# Altium PCB FPGA_board.PcbDoc (part 4 of 7)
Units mm, origin at the board's own origin, x right, y up, seen from the top; angles counter-clockwise.
Board outline 120 x 95 mm, 2 copper layers (Top Layer, Bottom Layer); 242 components, 219 nets, 1224 pads, 430 vias.
Unrouted connection lines stored in the file: 9.
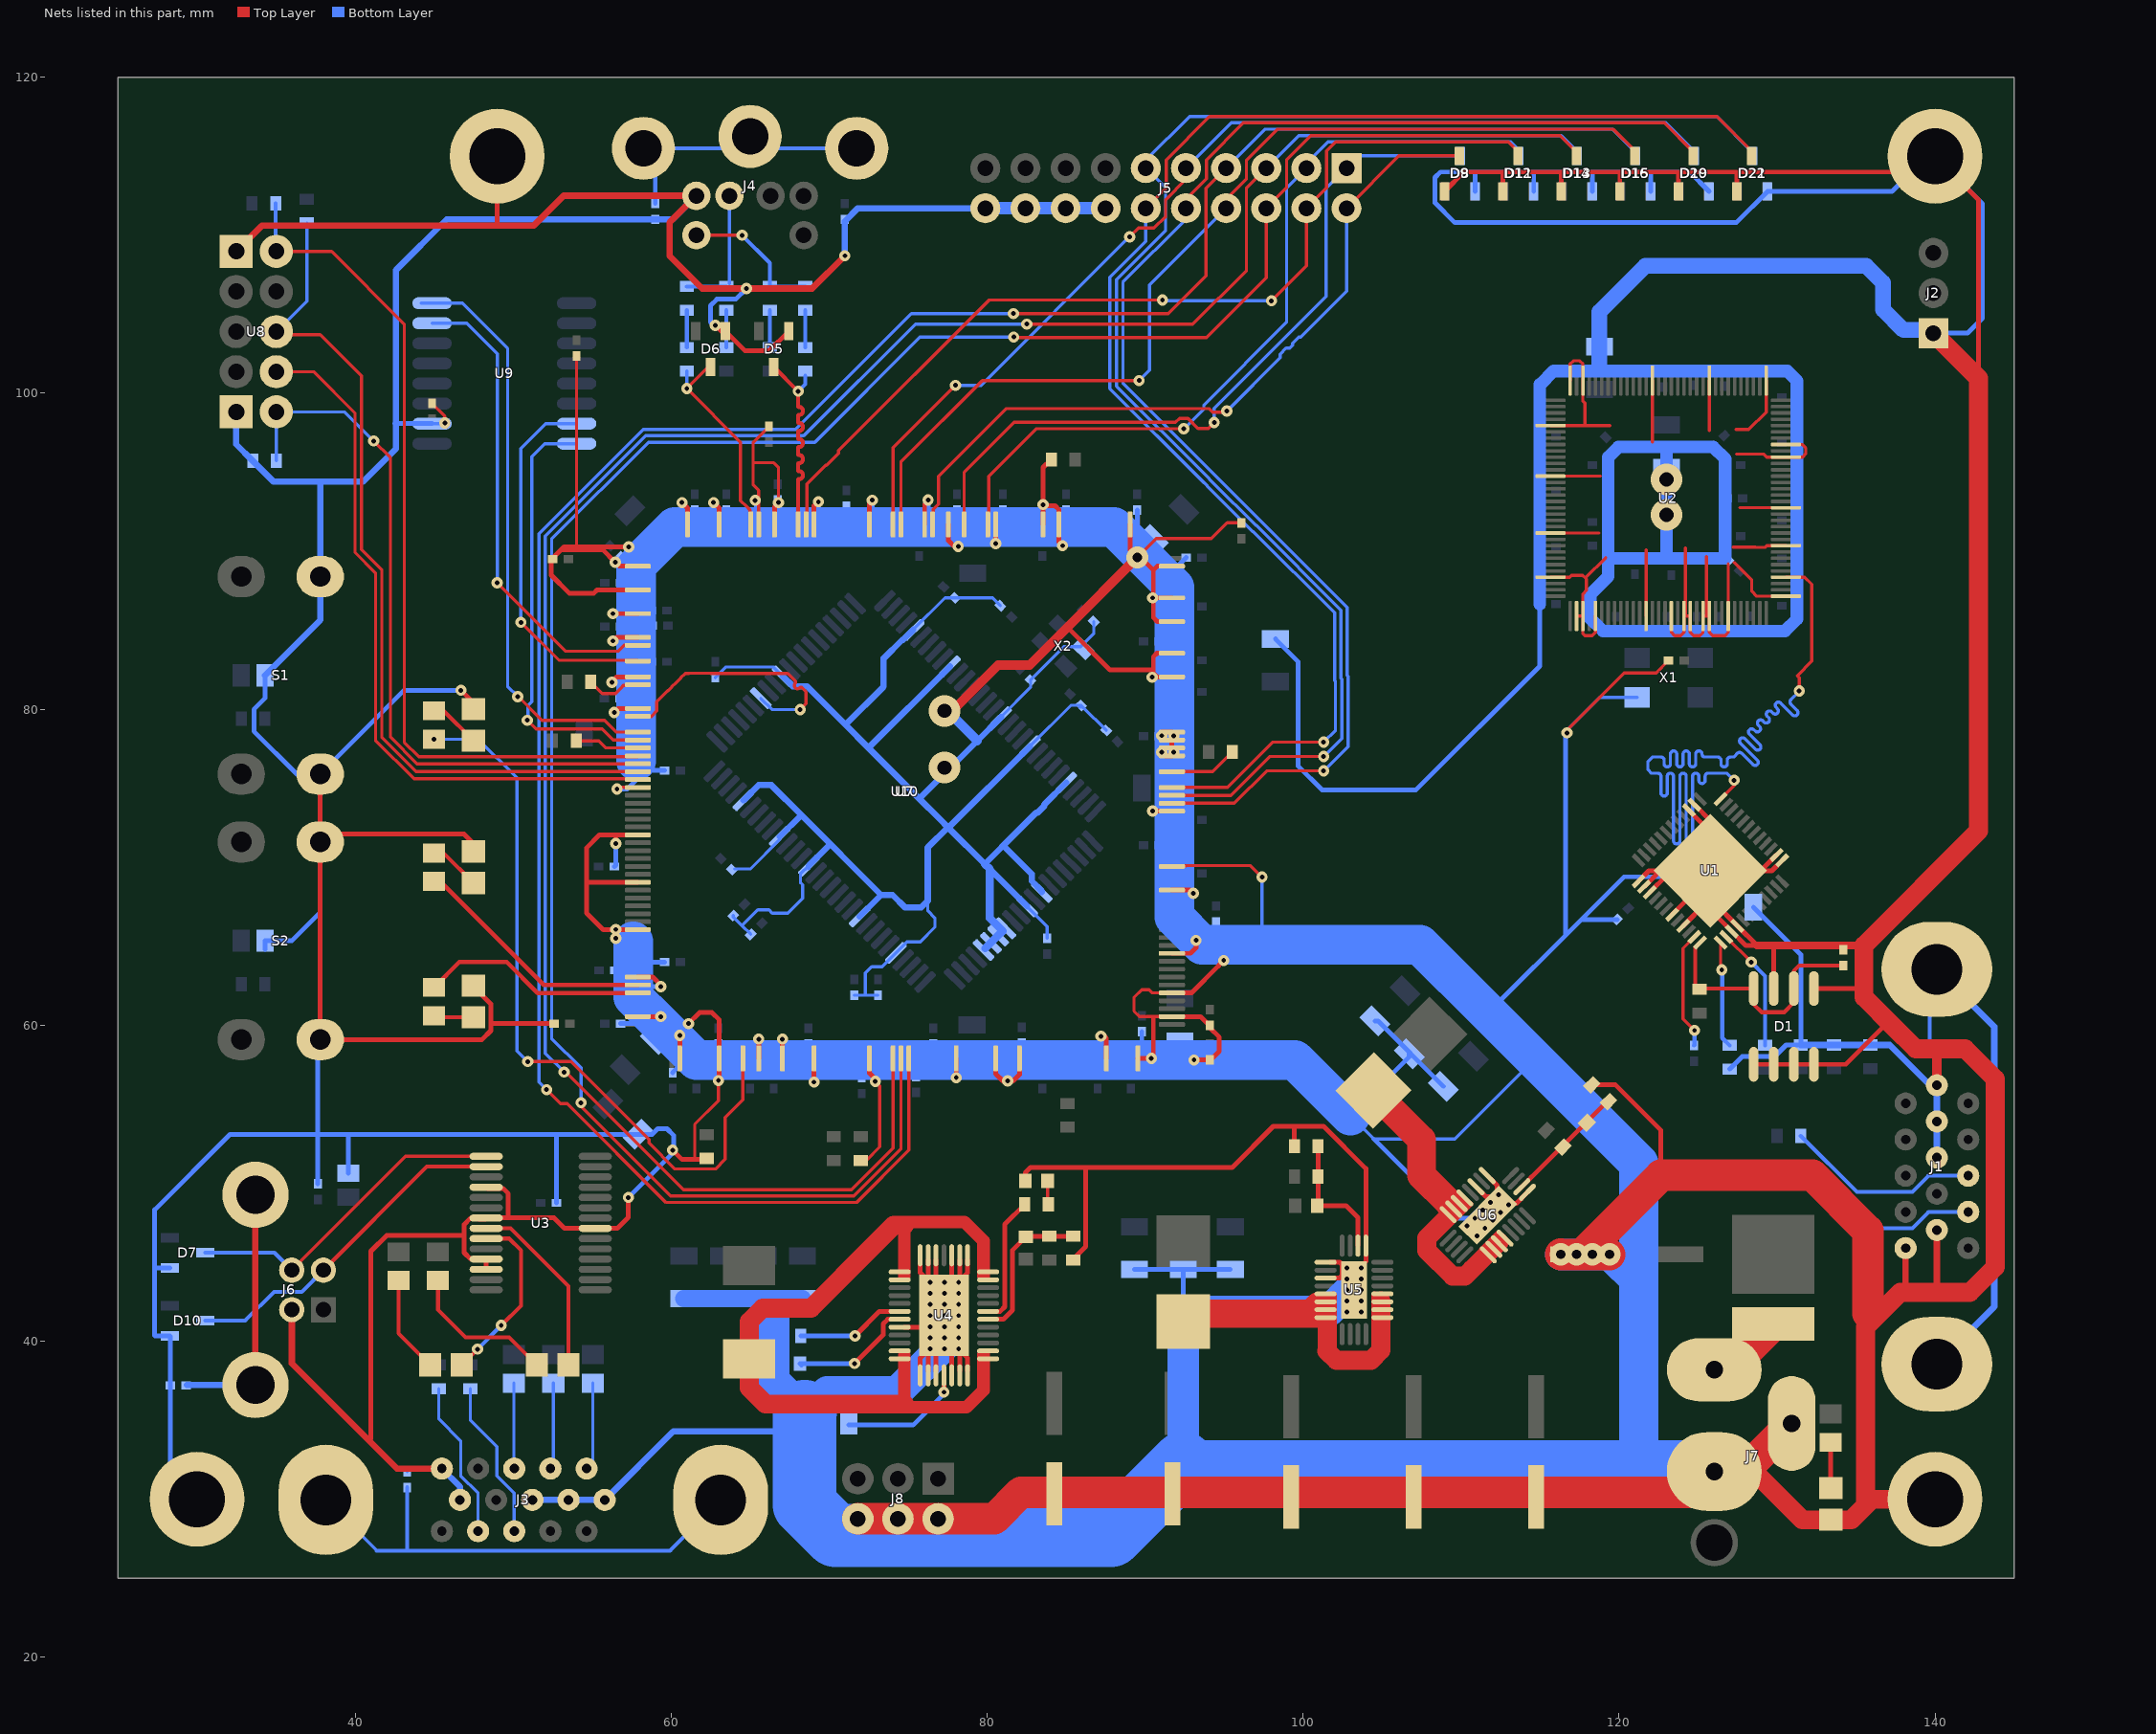
[diagram p4: the nets of this part, all layers, seen from the top]

## Via types
v1: diameter 0.71, hole 0.3, Top Layer to Bottom Layer, 393 vias
v2: diameter 1.4, hole 0.6, Top Layer to Bottom Layer, 32 vias
v3: diameter 2, hole 0.9, Top Layer to Bottom Layer, 4 vias
v4: diameter 1.2, hole 0.5, Top Layer to Bottom Layer, 1 vias

## Nets (pads, with @x,y where several pads share a name; then routed paths per layer and width w, separated by ;. In a path a pad name is that pad's centre, name@x,y a point inside that pad or via, vN(x,y) a via of type N, cw(c..) or ccw(c..) an arc to the next point about the centre after c; other vN are vias at no path point) (continued)
FB_SYNC: U1.12 U2.36 | length 64.4
  Top Layer w0.2: U1.12@126.429,74.318 127.281,75.17 v1(127.281,75.504) ; U2.36@130.56,88.353 131.749,88.353 132.19,87.913 132.19,83.04 131.275,82.125 131.404,81.996 v1(131.404,81.155)
  Bottom Layer w0.2: 125.85,76.975 125.65,76.975 ; v1(127.281,75.504) 126.835,75.95 125.625,75.95 ccw(c125.625,75.775) 125.45,75.775 125.45,75.5 cw(c125.25,75.5) 125.25,75.3 cw(c125.25,75.5) 125.05,75.5 125.05,75.75 ccw(c124.85,75.75) 124.85,75.95 ccw(c124.85,75.75) 124.65,75.75 124.65,71.673 cw(c124.45,71.673) 124.45,71.473 cw(c124.45,71.673) 124.25,71.673 124.25,75.75 ccw(c124.05,75.75) 124.05,75.95 ccw(c124.05,75.75) 123.85,75.75 123.85,71.673 cw(c123.65,71.673) 123.65,71.473 cw(c123.65,71.673) 123.45,71.673 123.45,75.75 ccw(c123.25,75.75) 123.25,75.95 ccw(c123.25,75.75) 123.05,75.75 123.05,74.702 cw(c122.85,74.702) 122.85,74.502 cw(c122.85,74.702) 122.65,74.702 122.65,75.75 ccw(c122.45,75.75) 122.45,75.95 122.25,75.95 122.05,75.95 121.825,76.175 121.825,76.7 122.1,76.975 122.45,76.975 122.65,76.975 cw(c122.65,76.775) 122.85,76.775 122.85,76.55 ccw(c123.05,76.55) 123.05,76.35 ccw(c123.05,76.55) 123.25,76.55 123.25,76.975 123.25,77.164 cw(c123.45,77.164) 123.45,77.364 cw(c123.45,77.164) 123.65,77.164 123.65,76.975 123.65,76.55 ccw(c123.85,76.55) 123.85,76.35 ccw(c123.85,76.55) 124.05,76.55 124.05,76.975 124.05,77.164 cw(c124.25,77.164) 124.25,77.364 cw(c124.25,77.164) 124.45,77.164 124.45,76.975 124.45,76.55 ccw(c124.65,76.55) 124.65,76.35 ccw(c124.65,76.55) 124.85,76.55 124.85,76.975 124.85,77.164 cw(c125.05,77.164) 125.05,77.364 cw(c125.05,77.164) 125.25,77.164 ccw(c125.439,77.164) 125.439,76.975 125.65,76.975 ; v1(131.404,81.155) 131.404,81.129 130.875,80.6 ccw(c131.016,80.459) 130.875,80.317 131.268,79.924 cw(c131.127,79.783) 131.268,79.641 cw(c131.127,79.783) 130.985,79.641 130.451,80.176 130.227,80.399 ccw(c130.086,80.258) 129.944,80.399 ccw(c130.086,80.258) 129.944,80.116 130.026,80.034 cw(c129.885,79.893) 130.026,79.751 cw(c129.885,79.893) 129.744,79.751 129.661,79.834 ccw(c129.52,79.692) 129.379,79.834 ccw(c129.52,79.692) 129.379,79.551 129.461,79.469 cw(c129.319,79.327) 129.461,79.186 cw(c129.319,79.327) 129.178,79.186 129.096,79.268 ccw(c128.954,79.127) 128.813,79.268 ccw(c128.954,79.127) 128.813,78.985 128.895,78.903 cw(c128.754,78.762) 128.895,78.62 cw(c128.754,78.762) 128.612,78.62 128.53,78.702 ccw(c128.389,78.561) 128.247,78.702 ccw(c128.389,78.561) 128.247,78.419 128.471,78.196 128.916,77.75 cw(c128.775,77.609) 128.916,77.467 cw(c128.775,77.609) 128.634,77.467 128.188,77.913 127.964,78.137 ccw(c127.823,77.995) 127.682,78.137 ccw(c127.823,77.995) 127.682,77.854 127.905,77.63 128.753,76.782 cw(c128.611,76.641) 128.753,76.5 cw(c128.611,76.641) 128.47,76.5 127.764,77.206 ccw(c127.622,77.064) 127.481,77.206 127.339,77.064 127.25,76.975 127.05,76.975 ccw(c127.05,76.775) 126.85,76.775 126.85,76.55 cw(c126.65,76.55) 126.65,76.35 cw(c126.65,76.55) 126.45,76.55 126.45,76.775 ccw(c126.25,76.775) 126.25,76.975 126.05,76.975 125.65,76.975
GND: C1.2 C2.1 C3.1 C4.2 C5.1 C7.2 C8.2 C9.1 C10.2 C11.2 C12.2 C13.2 C14.2 C15.2 C16.2 C17.2 C18.2 C19.2 C20.2 C21.2 C22.2 C23.2 C24.2 C25.2 C26.2 C27.2 C28.2 C29.2 C30.2 C31.2 C32.2 C33.2 C34.2 C35.2 C36.2 C37.2 C38.2 C39.1 C40.1 C41.1 C42.1 C43.1 C44.2 C45.1 C46.2 C47.2 C48.2 C49.2 C50.2 C51.2 C52.2 C53.2 C55.2 C56.2 C57.1 C58.1 C59.2 C60.2 C61.2 C62.2 C64.2 C65.2 C66.2 C67.2 C69.1 C70.1 C71.1 C72.2 C73.2 C74.2 C75.2 C76.2 C77.2 C78.2 C79.2 C80.2 C81.2 C82.2 C83.2 C84.2 C85.2 C86.2 C87.2 C88.2 C89.2 C90.2 C91.2 C92.2 C93.2 C94.2 C95.2 C96.2 C97.2 C98.2 C99.2 C100.2 C101.2 C102.2 C103.2 C104.2 C105.2 C106.2 C107.2 C108.2 C109.2 C110.2 C111.2 C112.2 C113.2 C114.2 C115.2 C116.2 C117.2 C118.2 C119.2 C120.2 C121.2 C122.2 C123.2 C124.2 C125.2 C126.2 C127.2 C128.2 C129.2 C130.2 C131.2 C132.2 C133.2 C134.2 C135.2 C136.2 C137.2 C138.2 C139.2 C140.2 C141.2 C142.2 C143.2 C144.2 C145.2 D1.1 D1.2 D1.3 D1.4 D1.5 D1.7 D2.2 D3.2 D4.2 D5.1 D6.1 D7.1 D8.1 D9.1 D10.1 D11.1 D12.1 D13.1 D14.1 D15.1 D16.1 D19.1 D20.1 D21.1 D22.1 D24.2 J1.5 J1.6 J1.7 J1.8 J1.10 J2.1 J3.5 J3.6 J3.7 J3.8 J3.10 J4.3 J5.17 J5.18 J5.19 J5.20 J6.4 J7.2 J7.3 J8.4 J8.5 J8.6 pad. R4.1 R5.2 R6.2 R8.1 R31.2 R33.2 R35.2 R37.2 R40.1 R46.2 R47.2 R48.2 S1.1 S2.1 U1.1 U1.2 U1.14 U1.15 U1.25 U1.26 U1.27 U1.31 U1.33 U1.39 U1.40 U1.49 U2.2 U2.3 U2.5 U2.13 U2.17 U2.19 U2.20 U2.22 U2.23 U2.26 U2.33 U2.41 U2.47 U2.55 U2.57 U2.65 U2.74 U2.83 U2.94 U2.96 U2.101 U2.109 U2.118 U2.125 U3.7 U3.18 U3.21 U3.25 U3.26 U4.8 U4.13 U4.14 U4.15 U4.17 U4.18 U4.19 U4.32 U4.33 U4.34 U4.36 U4.37 U4.38 U4.39 U5.1 U5.3 U5.21 U5.25 U6.1 U6.3 U6.21 U6.25 U7.2 U7.5 U7.8 U7.11 U7.16 U7.20 U7.30 U7.36 U7.42 U7.48 U7.54 U7.59 U7.62 U7.67 U7.72 U7.75 U7.79 U7.86 U7.97 U7.102 U7.105 U7.116 U7.120 U7.122 U7.125 U7.130 U7.138 U7.141 U7.148 U7.155 U7.156 U7.157 U7.158 U7.165 U7.168 U7.172 U7.175 U7.179 U7.182 U7.191 U7.193 U7.199 U7.205 U7.208 U7.215 U7.222 U7.227 U7.229 U7.234 U7.238 U8.2 U8.10 U9.10 U10.5 U10.10 U10.17 U10.21 U10.26 U10.40 U10.55 U10.60 U10.67 U10.71 U10.76 U10.88 U10.90 U10.93 U10.94 U10.95 U10.96 X1.2 X2.2 | length 1969.9
  Top Layer w0.2: C70.1@44.875,99.35 45.68,98.545 v1(45.68,98.118) ; 53.975,90.275 54.025,90.325 C71.1@54.025,102.35 ; v1(56.579,74.945) 56.684,75.05 U7.30@57.9,75.05 ; 61.5,51.5 61.5,53.725 63,55.225 v1(63,56.5) ; R48.2@62.1,51.5 R48.2@62.25,51.5 ; U7.229@65.55,91.7 65.55,93.85 65.2,94.2 65.2,95.6 ; C132.2@66.2,97.9 65.2,96.9 65.2,95.6 ; v1(66.805,93.08) 66.805,95.295 66.5,95.6 65.2,95.6 ; R46.2@72.35,51.45 73.2,52.3 73.2,56.175 v1(72.925,56.45) ; U4.39@76.271,42.641 76.771,42.141 U4.39@77.271,41.641 U4.39@77.771,42.141 ; v2(89.5,89.6) 90.7,90.8 94.2,90.8 95.2,91.8 C99.2@96.1,91.8 ; U7.122@91.7,60.55 89.65,60.55 89.3,60.9 89.3,61.755 89.8,62.255 90.264,62.255 90.469,62.05 U7.125@91.7,62.05 ; U7.141@91.7,70.05 91.75,70.1 92.605,70.1 92.61,70.105 96.678,70.105 v1(97.405,69.378) v1@97.401,69.375 ; U2.125@115.66,88.353 116.871,88.353 116.995,88.478 117.696,88.478 117.865,88.309 ; U2.118@115.66,91.153 118.736,91.153 ; U2.109@115.66,94.753 118.811,94.753 ; U2.101@115.66,97.953 116.71,97.953 ; v1(116.706,78.504) 116.706,78.519 116.625,78.6 120.325,82.3 122.35,82.3 C7.2@123.125,83.075 ; U2.96@116.91,100.803 116.91,101.848 117.115,102.053 117.505,102.053 117.71,101.848 U2.94@117.71,100.803 117.71,99.493 117.833,99.37 117.833,98.005 117.885,97.953 ; 116.959,97.953 116.71,97.953 ; U2.2@117.31,85.903 U2.3@117.71,85.903 ; U2.5@118.51,85.903 118.51,84.858 118.305,84.653 117.836,84.653 117.71,84.779 U2.3@117.71,85.903 ; 119.16,89.604 117.865,88.309 ; 119.411,97.953 117.885,97.953 ; U2.13@121.71,85.903 121.71,90.079 ; 122.11,96.929 U2.83@122.11,100.803 ; U2.17@123.31,85.903 123.31,84.858 123.515,84.653 123.905,84.653 124.11,84.858 U2.19@124.11,85.903 ; 124.2,90.214 124.2,85.993 U2.19@124.11,85.903 ; 125.535,89.654 125.535,85.903 ; 125.71,97.654 U2.74@125.71,100.803 ; 126.91,89.204 U2.26@126.91,85.903 126.91,84.858 126.705,84.653 125.915,84.653 125.71,84.858 U2.23@125.71,85.903 125.535,85.903 ; 127.236,90.256 128.636,90.256 128.649,90.243 129.239,90.243 129.349,90.353 130.112,90.353 U2.41@130.56,90.353 ; 127.285,89.279 128.398,88.166 128.398,87.46 128.705,87.153 U2.33@130.56,87.153 ; 127.41,97.704 128.21,97.704 129.31,98.804 129.31,99.348 129.31,99.358 U2.65@129.31,100.803 ; 127.436,96.153 129.149,96.153 129.349,95.953 U2.55@130.56,95.953 131.605,95.953 131.81,96.158 131.81,96.548 131.605,96.753 U2.57@131.135,96.753 ; 127.661,92.753 U2.47@130.56,92.753 ; 116.71,97.953 117.885,97.953 ; U2.3@117.71,85.903 117.71,87.304 117.933,87.527 117.933,88.241 117.865,88.309 ; U2.19@124.11,85.903 U2.20@124.51,85.903 124.51,84.858 124.715,84.653 125.109,84.653 125.31,84.854 U2.22@125.31,85.903 125.535,85.903
  Top Layer w0.3: S1.1@37.8,75.896 S2.1@37.8,71.596 ; 40.978,33.8 41.002,33.825 41.002,45.697 42.005,46.7 46.9,46.7 ; v1(46.7,81.2) 47.5,80.4 D2.2@47.5,80 ; D4.2@47.5,62.5 47.5,62.445 48.6,61.345 48.6,60.225 ; D3.2@47.5,71 47.5,71.5 46.9,72.1 38.304,72.1 S2.1@37.8,71.596 ; U3.25@47.8,45.2 47.312,45.2 46.9,45.612 46.9,46.7 ; U3.21@48,47.875 U3.21@47.925,47.8 ; U3.25@48.225,45.275 U3.25@48.3,45.2 U3.26@48.3,44.55 ; U3.18@48.3,49.75 48.375,49.675 49.363,49.675 49.7,49.338 49.7,47.805 ; 49,110.6 pad.@49,115 ; C89.2@52.6,60.1 48.725,60.1 48.6,60.225 ; 54.645,69.105 54.7,69.05 U7.42@57.9,69.05 ; v1(56.255,81.7) 56.255,81.755 56.55,82.05 U7.16@57.9,82.05 ; v1(56.325,84.325) 56.55,84.55 U7.11@57.9,84.55 ; v1(56.4,79.8) 56.65,80.05 U7.20@57.9,80.05 ; v1@56.475,86.05 U7.8@57.9,86.05 ; v1(56.5,65.5) v1@56.5,65.875 ; v1(56.5,66.063) v1@56.5,66.05 ; v1(56.5,71.5) 56.5,72 56.45,72.05 ; v1(57.3,49.1) 57.3,47.85 56.6,47.15 U3.7@55.2,47.15 53.255,47.15 52.6,47.805 49.7,47.805 ; v1(57.325,90.275) 53.975,90.275 53.23,90.275 53.055,90.1 ; U7.59@57.9,60.55 v1(59.35,60.55) ; U7.54@57.9,63.05 58.85,63.05 v1@59.4,62.5 ; U7.36@57.9,72.05 56.45,72.05 ; U7.5@57.9,87.55 55.322,87.55 55.117,87.345 53.558,87.345 52.412,88.491 52.412,89.412 C103.2@52.5,89.5 52.5,89.545 53.055,90.1 ; U7.2@57.9,89.05 56.725,89.05 v1(56.475,89.3) 55.675,90.1 53.055,90.1 ; v1(60.1,52.1) 60.7,51.5 R48.2@62.1,51.5 ; U7.62@60.55,57.9 v1(60.55,59.35) ; v1(60.695,93.08) 61.05,92.725 U7.238@61.05,91.7 ; v1(61.1,60.1) 61.805,60.805 62.592,60.805 63.05,60.347 U7.67@63.05,57.9 ; v1(62.695,93.08) 63.05,92.725 U7.234@63.05,91.7 ; v1(62.8,104.3) 63.175,103.925 D6.1@63.45,103.925 64.675,102.7 66.225,102.7 D5.1@67.45,103.925 ; v1(63,56.5) 63.05,56.55 U7.67@63.05,57.875 ; v1@64.7,106.625 v1(64.775,106.625) ; U7.72@65.55,57.9 v1@65.55,59.05 ; U7.227@66.55,91.7 66.55,92.825 v1(66.805,93.08) ; U7.75@67.05,57.9 v1(67.05,59.125) ; U7.79@69.05,57.9 69.05,56.406 v1(69.053,56.403) ; U7.222@69.05,91.7 69.05,92.875 69.375,93.2 69.375,93.176 v1(69.328,93.13) ; U7.86@72.55,57.9 72.55,56.974 72.925,56.599 v1(72.925,56.45) ; U7.215@72.55,91.7 72.55,93.04 v1(72.742,93.232) ; U4.8@74.771,40.891 U4.39@76.521,40.891 ; U4.13@75.771,38.141 75.771,38.941 U4.39@76.271,39.441 ; U4.38@75.771,45.141 75.771,44.341 U4.39@76.271,43.841 ; U7.208@76.05,91.7 76.05,92.989 76.3,93.238 76.293,93.245 v1(76.267,93.245) ; U4.14@76.271,38.141 U4.39@76.271,39.441 ; U4.39@76.271,42.641 U4.39@76.271,43.841 ; U4.37@76.271,45.141 U4.39@76.271,43.841 ; U4.15@76.771,38.141 U4.39@76.771,39.941 ; U4.39@76.771,42.141 U4.39@76.771,43.341 ; U4.36@76.771,45.141 U4.39@76.771,43.341 ; U7.205@77.55,91.7 77.55,90.675 77.925,90.3 v1(78.175,90.3) ; U4.17@77.771,38.141 U4.39@77.771,39.941 ; U4.34@77.771,45.141 U4.39@77.771,43.441 ; v1(78.05,56.684) U7.97@78.05,57.9 ; U4.18@78.271,38.141 U4.39@78.271,39.441 ; U4.39@78.271,43.841 78.771,44.341 U4.32@78.771,45.141 ; U4.39@78.271,43.941 U4.39@77.771,43.441 ; U4.33@78.271,45.141 U4.39@78.271,43.541 ; U4.19@78.771,38.141 78.771,38.941 U4.39@78.271,39.441 ; U7.102@80.55,57.9 80.55,56.925 81,56.475 v1(81.3,56.475) 81.65,56.475 82.05,56.875 U7.105@82.05,57.9 ; v1(80.55,90.484) U7.199@80.55,91.7 ; C58.1@82.429,50.059 82.429,50.679 82.75,51 95.515,51 98.115,53.6 99.4,53.6 ; U7.193@83.55,91.7 v1(83.55,92.95) ; R47.2@84.05,95.8 83.55,95.3 v1(83.55,92.95) ; v1(84.775,90.35) 84.55,90.575 U7.191@84.55,91.7 84.55,92.626 84.301,92.875 83.625,92.875 v1(83.55,92.95) ; 85.063,85.162 85.113,85.162 87.78,82.495 90.52,82.495 90.525,82.5 ; R31.2@85.45,45.15 85.45,45.205 86.25,46.005 86.25,51 ; v1@87.397,59.328 87.55,59.175 U7.116@87.55,57.9 ; U7.182@89.05,91.7 89.05,90.05 v2(89.5,89.6) 89.726,89.6 90.525,88.801 ; U7.120@89.55,57.9 v1(90.4,57.9) 90.525,58.025 90.525,60.5 ; v1(90.475,87.05) 90.525,87.1 90.525,88.801 ; v1(90.479,73.554) 90.483,73.55 U7.148@91.7,73.55 ; U7.158@91.051,78.55 U7.158@91.7,78.55 U7.157@91.7,78.05 U7.156@91.7,77.55 U7.155@91.7,77.05 91.283,77.05 v1(91.054,77.279) ; U7.179@91.493,89.05 90.774,89.05 90.525,88.801 ; U7.125@91.7,62.05 92.95,62.05 94.655,63.755 94.655,63.778 v1(94.976,64.1) ; U7.130@91.7,64.55 92.875,64.55 93.225,64.9 v1(93.225,65.375) ; U7.138@91.7,68.55 92.85,68.55 v1(93.05,68.35) ; U7.165@91.7,82.05 90.774,82.05 90.525,82.299 90.525,82.5 ; U7.168@91.7,83.55 90.75,83.55 90.525,83.325 90.525,82.5 ; U7.172@91.7,85.55 90.774,85.55 90.525,85.799 90.525,87.05 U7.175@91.7,87.05 ; U7.122@91.907,60.55 93.505,60.55 94.055,60 C95.2@94.1,60 94.1,59.845 94.7,59.245 94.7,58.355 94.145,57.8 C87.2@94.1,57.8 v1(93.1,57.8) ; R35.2@99.45,52.35 99.45,53.55 99.4,53.6 ; U5.3@101.725,44 102.325,44 102.475,44.15 102.475,44.85 102.325,45 U5.1@101.725,45 ; U5.25@103.225,43.25 103.575,43.6 103.575,44.65 103.625,44.7 103.975,45.05 U5.21@103.975,45.75 ; U5.21@103.975,46.05 103.975,50.925 101.3,53.6 99.4,53.6 ; D9.1@108.95,112.775 110.175,114 112.75,114 ; U6.3@111.159,49.568 111.584,49.144 111.69,49.144 U6.25@111.796,49.144 ; U6.1@111.866,50.275 112.291,49.851 U6.25@112.291,49.639 ; D12.1@112.65,112.775 112.65,113.9 112.75,114 ; U6.25@112.927,48.719 113.493,48.719 U6.21@114.273,49.5 ; D14.1@116.35,112.775 116.35,113.9 116.25,114 ; R37.2@118.27,56.23 119.77,56.23 122.65,53.35 122.65,50.5 ; D16.1@120.05,112.775 120.05,113.95 120,114 ; U1.25@121.232,69.121 121.886,69.775 U1.49@122.593,69.775 ; U1.26@121.585,68.767 U1.49@122.593,69.775 ; U1.27@121.939,68.414 123.05,69.525 U1.49@123.05,69.775 ; U1.31@123.353,67 U1.49@125.775,69.421 ; D20.1@123.75,112.775 123.75,114 ; U1.33@124.06,66.292 U1.49@125.509,67.741 ; U1.15@124.414,73.611 U1.49@125.775,72.25 ; U1.14@124.767,73.965 125.775,72.957 U1.49@125.775,72.25 ; D22.1@127.45,112.775 127.45,113.95 127.5,114 ; D1.1@128.52,57.525 D1.2@129.79,57.525 D1.3@131.06,57.525 134.35,57.525 136.737,59.913 137.362,59.913 ; 129.725,65.05 129.79,64.985 D1.7@129.79,62.325 ; U1.2@129.965,70.783 U1.49@128.957,69.775 ; U1.1@130.318,70.429 129.664,69.775 U1.49@128.957,69.775 ; D1.5@132.33,62.325 134.95,62.325 135.5,61.775 ; 142.75,100.95 142.75,112.25 pad.@140,115 139,114 127.5,114 ; S2.1@37.8,71.596 S2.1@37.8,59.096 48.041,59.096 48.6,59.655 48.6,60.225 ; 46.9,46.7 46.9,47.388 47.312,47.8 U3.21@47.925,47.8 ; U3.21@47.925,47.8 47.85,47.725 48.225,47.725 U3.21@48.3,47.8 ; U3.21@47.925,47.8 U3.21@48.3,47.8 ; U3.21@48.3,47.8 48.305,47.805 49.7,47.805 ; 56.45,72.05 55.475,72.05 54.645,71.22 54.645,67.105 55.7,66.05 v1@56.5,66.05 ; v1@56.5,65.875 v1@56.675,66.05 ; v1@56.5,65.875 v1@56.5,66.05 ; v1@56.5,66.05 v1@56.675,66.05 ; v1@56.675,66.05 v1@56.728,66.05 ; v1@56.728,66.05 U7.48@57.9,66.05 v1@56.728,66.05 ; U4.39@76.271,39.441 76.271,39.525 76.271,40.225 76.271,40.641 76.477,40.848 U4.39@76.521,40.891 ; U4.39@76.271,39.441 76.377,39.548 76.727,39.898 U4.39@76.771,39.941 ; U4.39@76.271,43.841 U4.39@76.771,43.341 ; U4.39@76.521,40.891 U4.39@76.771,41.141 ; U4.39@76.771,39.941 U4.39@77.271,40.441 ; U4.39@76.771,39.941 U4.39@76.771,41.141 ; U4.39@76.771,41.141 U4.39@77.271,41.641 ; U4.39@76.771,43.341 U4.39@77.271,42.841 ; U4.39@77.271,40.441 U4.39@77.771,39.941 ; U4.39@77.271,40.441 77.271,40.925 77.271,41.625 U4.39@77.271,41.641 ; U4.39@77.271,41.641 77.293,41.618 U4.39@77.771,41.141 ; U4.39@77.271,41.641 U4.39@77.271,42.541 ; U4.39@77.271,42.541 U4.39@77.771,43.041 ; U4.39@77.271,42.541 U4.39@77.271,42.841 ; U4.39@77.271,42.841 77.271,42.941 U4.39@77.771,43.441 ; U4.39@77.771,39.941 78.193,39.518 U4.39@78.271,39.441 ; U4.39@77.771,39.941 U4.39@77.771,41.141 ; U4.39@77.771,41.141 78.093,40.818 78.271,40.641 78.271,40.225 78.271,39.525 U4.39@78.271,39.441 ; U4.39@77.771,43.041 77.771,42.141 78.271,42.641 U4.39@78.271,43.541 ; U4.39@77.771,43.041 U4.39@78.271,43.541 ; U4.39@77.771,43.041 U4.39@77.771,43.441 ; 112.75,114 116.25,114 ; 116.25,114 120,114 ; 120,114 123.75,114 ; U1.49@122.593,69.775 U1.49@123.05,69.775 ; U1.49@123.05,69.775 U1.49@125.775,69.775 ; 123.75,114 127.5,114 ; U1.49@125.509,67.741 U1.49@125.775,67.741 ; U1.49@125.509,67.741 U1.49@125.775,68.007 ; U1.49@125.775,67.741 126.041,67.741 U1.40@127.49,66.292 128.732,65.05 128.025,65.05 U1.39@127.136,65.939 125.775,67.3 U1.49@125.775,67.741 ; U1.49@125.775,67.741 U1.49@125.775,68.007 ; U1.49@125.775,68.007 U1.49@125.775,69.421 ; U1.49@125.775,69.421 U1.49@125.775,69.775 ; U1.49@125.775,69.775 U1.49@125.775,72.25 ; U1.49@125.775,69.775 U1.49@128.957,69.775
  Top Layer w0.4: U8.10@32.48,108.98 34.1,110.6 49,110.6 51.3,110.6 53.2,112.5 J4.3@61.6,112.5 59.9,110.8 59.9,108.7 61.975,106.625 v1@64.7,106.625 ; J6.4@36,42 36,38.6 42.66,31.94 J3.5@45.497,31.94 ; v1(64.775,106.625) 68.925,106.625 v1(71,108.7) ; D24.2@133.4,28.7 D24.2@133.8,28.7 ; 137.8,43.1 138.135,43.435 J1.5@138.135,45.897 ; 140.1,43.1 140.115,43.115 J1.10@140.115,47.043
  Top Layer w0.5: 128.732,65.05 129.725,65.05 135.5,65.05
  Top Layer w0.6: v3@77.3,79.4 80.7,82.8 82.7,82.8 85.063,85.162 v2(89.5,89.6) ; 140.1,58.5 140.115,58.485 J1.6@140.115,56.202
  Top Layer w1.2: J7.2@126.15,31.75 128.55,31.75 131.6,28.7 D24.2@133.4,28.7 ; D24.2@133.8,28.7 134.7,28.7 135.6,29.6 ; J2.1@139.9,103.8 142.75,100.95 142.75,72.3 135.5,65.05 135.5,61.775 137.362,59.913 138.775,58.5 140.1,58.5 141.9,58.5 143.8,56.6 143.8,44.7 142.2,43.1 140.1,43.1 137.8,43.1 135.6,40.9 135.6,29.6 ; pad.@140,30 136,30 135.6,29.6
  Top Layer w2: J8.6@71.82,28.76 80.46,28.76 82.15,30.45 J7.2@126.1,30.45 ; C49.2@116.3,45.525 v2(116.3,45.5) v2(117.3,45.5) C49.2@117.65,45.5 ; v2(119.4,45.5) v2(118.3,45.5) C49.2@117.65,45.5 ; J7.2@126.025,31.75 127.875,31.75 J7.3@130.925,34.8 ; 135.75,41.75 135.75,47 132.25,50.5 122.65,50.5 C49.2@117.65,45.5
  Bottom Layer w0.2: C9.1@43.3,31.75 43.49,31.94 J3.5@45.497,31.94 ; U9.10@44.875,98.075 45.637,98.075 v1(45.68,98.118) ; C77.2@62.8,82 63.475,82.675 66.465,82.675 U10.40@67.057,82.083 ; C74.2@63.946,66.946 63.946,66.846 64.493,66.3 ; C85.2@64.029,69.895 65.021,69.895 66.88,71.754 U10.21@66.88,71.936 ; C84.2@65.046,65.746 64.493,66.3 ; 66.8,91.534 66.8,92.9 66.805,92.905 v1(66.805,93.08) ; U10.17@68.719,69.9 U10.17@68.719,70.098 68.19,69.569 68.19,69.035 68.33,68.896 68.33,68.03 67.395,67.095 66.405,67.095 66.2,67.3 65.493,67.3 64.493,66.3 ; C83.2@71.6,61.9 72.3,61.9 ; 72.725,91.534 72.742,91.551 ; C75.2@73.1,61.9 72.3,61.9 ; U10.55@75.333,85.042 77.338,87.046 C82.2@77.954,87.046 80.354,87.046 C81.2@80.846,86.554 ; 76.25,67.875 76.25,67.249 76.7,66.799 76.7,66.2 75.775,65.275 74.927,65.275 U10.5@74.234,64.582 73.352,63.7 72.7,63.7 72.3,63.3 72.3,61.9 ; U10.67@80.881,79.502 82.754,81.375 C80.2@82.754,81.846 84.872,83.965 85.931,83.965 86.754,84.787 C69.1@86.754,85.546 ; U10.90@82.543,67.517 83.8,66.26 C76.2@83.8,65.5 ; U10.71@82.72,77.664 85.302,80.246 C78.2@85.954,80.246 ; C78.2@85.854,80.146 86.054,80.146 C79.2@87.546,78.654 ; C93.2@92.6,69.6 92.6,68.175 92.7,68.075 ; v1(97.405,69.378) 97.405,65.145 97.45,65.1 ; 103.18,54.1 104.48,52.8 109.6,52.8 114.65,57.85 ; v1@116.625,78.6 118.775,80.75 X1.2@121.15,80.75 ; v1@116.625,78.682 116.625,78.585 v1(116.706,78.504)
  Bottom Layer w0.3: D7.1@28.275,44.65 27.375,44.65 27.325,44.7 ; pad.@30,30 28.3,31.7 C43.1@28.3,37.2 28.3,40.325 D10.1@28.275,40.35 27.35,40.35 27.325,40.375 27.325,44.7 ; C42.1@34.3,64.8 C42.1@34.3,65.346 35.996,65.346 37.8,67.15 S2.1@37.8,71.596 ; C41.1@34.3,82.146 34.3,80.691 33.6,79.991 33.6,78.601 36.305,75.896 S1.1@37.8,75.896 43.104,81.2 v1(46.7,81.2) ; C44.2@37.65,49.975 37.65,53 ; S2.1@37.8,59.096 38.096,58.8 37.65,58.354 37.65,53.091 ; C45.1@39.575,50.625 39.575,53.091 ; 42.5,98.075 42.6,98.075 U9.10@44.875,98.075 ; C46.2@52.75,48.75 52.75,53.041 52.7,53.091 ; v1(56.255,81.7) 57.77,81.7 57.795,81.725 ; C100.2@56.425,70.05 56.5,70.125 v1(56.5,71.5) ; v1@56.5,65.737 v1@56.5,65.875 ; v1(56.579,74.945) 57.22,74.945 57.795,75.52 57.795,76.72 58.39,76.125 C129.2@59.6,76.125 ; C104.2@56.8,60.1 58.9,60.1 v1@59.1,60.3 ; C118.2@56.8,89.4 58.097,89.4 58.2,89.4 ; v1(57.3,49.1) 60.1,51.9 v1(60.1,52.1) 60.155,52.155 60.155,53.042 59.742,53.455 59.158,53.455 58.794,53.091 C91.2@57.909,53.091 52.7,53.091 ; 57.55,80.2 57.583,80.167 ; 57.601,64 C114.2@59.6,64 ; 57.75,61.65 58.549,62.45 v1(59.35,62.45) ; C113.2@60.1,57 60.9,57.8 61.6,57.8 ; 60.232,91.534 60.675,91.978 60.675,93.06 v1(60.695,93.08) ; v1@61.1,59.9 v1(61.1,60.1) ; 62.675,91.534 62.695,91.554 v1(62.695,93.08) ; v1@62.8,104.2 62.5,104.5 62.5,105.545 62.905,105.95 64.1,105.95 v1(64.775,106.625) ; v1(65.325,93.225) 65.4,93.15 65.4,91.534 ; v1(67.05,59.125) 67.05,57.875 67.125,57.8 ; 69.05,57.8 69.053,57.797 v1(69.053,56.403) ; 69.325,91.534 69.328,91.538 v1(69.328,93.13) ; 72.55,90.484 72.575,90.509 72.575,90.625 ; 72.742,91.551 v1(72.742,93.232) ; 76.05,90.484 76.05,90.65 76.112,90.712 ; v1(76.267,93.245) 76.267,91.543 76.275,91.534 ; v1(80.55,90.484) 80.575,90.509 v1@80.575,90.575 ; U10.76@85.018,75.346 U10.76@85.018,75.366 ; 86.2,57.8 86.2,58.124 ; v1(87.204,59.303) 87.204,59.203 87.329,59.328 v1@87.397,59.328 ; 87.429,57.871 87.5,57.8 ; 89.034,90.534 89.5,91 C86.2@89.5,92.6 ; 89.1,57.8 88.982,57.8 89.8,58.618 C106.2@89.8,59.6 ; C60.2@89.325,44.55 C61.2@92.425,44.55 ; v1(90.479,73.554) 90.521,73.554 v1@90.525,73.55 ; 90.634,88.934 91.934,88.934 C124.2@92.6,89.6 ; C94.2@90.808,78.35 C94.2@90.829,78.329 ; v1@90.933,77.4 v1(91.054,77.279) ; 91.521,86.429 91.85,86.1 ; 91.549,73.55 91.85,73.851 ; 91.628,77.575 v1@91.85,77.353 ; 91.8,70.05 91.85,70 ; 91.821,82.929 91.85,82.9 ; 91.85,66.075 91.85,66.85 ; 93.3,64.975 v1@93.3,65.225 ; 93.625,40.875 92.425,42.075 C61.2@92.425,44.55 ; v1@94.65,64.05 v1@94.655,64.045 ; C62.2@95.4,44.55 C61.2@92.425,44.55 ; C90.2@98.25,84.45 99.7,83 99.7,76.4 101.2,74.9 107.15,74.9 114.985,82.735 C37.2@114.985,86.654 ; 103.18,54.1 103,54.28 106.72,57.999 C67.2@106.72,58.199 ; 104.48,52.8 109.48,47.8 v1(110.876,47.8) ; C66.2@104.552,60.267 104.752,60.267 C65.2@108.888,56.132 ; D8.1@110.9,112.775 110.9,113.9 111,114 ; 111.713,61.212 111.713,60.787 117.621,66.696 ; D11.1@114.6,112.775 114.6,113.9 114.5,114 ; 116.625,65.725 v1@116.625,78.6 ; D13.1@118.3,112.775 118.3,113.95 118.25,114 ; C2.1@119.871,66.696 117.621,66.696 ; D15.1@122,112.775 122,114 ; C3.1@123.121,69.446 123.07,69.395 120.32,69.395 117.621,66.696 ; D19.1@125.7,112.775 124.475,114 122,114 ; R8.1@127,57.225 127.8,58.025 129.845,58.025 130.57,58.75 R6.2@131.5,58.75 131.5,64.475 C1.2@128.5,67.475 ; J2.1@139.9,103.8 142.05,103.8 143,104.75 143,112 pad.@140,115 139.5,115 137.275,112.775 D21.1@129.4,112.775 127.42,110.795 109.61,110.795 108.35,112.055 108.35,113.65 108.7,114 111,114 ; 27.325,44.7 27.325,48.325 32.091,53.091 37.65,53.091 ; 37.65,53 37.65,53.091 ; 37.65,53 37.741,53.091 ; 37.65,53.091 37.741,53.091 ; 37.741,53.091 39.575,53.091 ; 39.575,53.091 52.7,53.091 ; 111,114 114.5,114 ; 114.5,114 118.25,114 ; 118.25,114 122,114
  Bottom Layer w0.4: U8.2@32.48,98.82 32.48,96.77 R40.1@33.525,95.725 34.85,94.4 37.9,94.4 ; C41.1@34.3,82.146 37.8,85.646 37.8,94.3 37.9,94.4 ; J3.5@45.497,31.94 46.643,30.795 J3.10@46.643,29.96 ; J3.8@51.223,29.96 55.802,29.96 60.142,34.3 68.7,34.3 ; J4.3@61.6,112.5 60.1,111 C40.1@59,111 45.8,111 42.6,107.8 42.6,98.075 42.6,96.5 40.5,94.4 37.9,94.4 ; U10.26@64.582,74.234 65.548,75.2 66.344,75.2 68.244,73.3 ; U10.21@66.88,71.936 68.244,73.3 ; U10.40@67.057,82.083 67.071,82.083 67.7,81.454 68.605,81.454 71.039,79.021 ; U10.17@68.719,70.098 70.011,71.389 ; v1(71,108.7) 71,110.884 71.826,111.71 J5.20@79.89,111.71 ; U10.10@71.936,66.88 73.3,68.244 ; 74.317,75.696 74.317,75.742 ; U10.55@75.333,85.042 74.68,84.389 74.629,84.389 73.457,83.217 73.457,81.439 71.039,79.021 ; U10.60@77.664,82.72 72.502,77.558 ; U10.67@80.881,79.502 79.379,78 75.742,74.363 75.742,74.317 ; U10.90@82.543,67.517 80.176,69.884 79.856,70.204 79.864,70.211 ; U10.71@82.72,77.664 77.558,72.502 ; U10.88@83.462,68.436 83.462,68.493 82.833,69.121 82.833,69.567 81.052,71.348 81,71.348 ; U10.76@85.018,75.366 83.63,73.978 83.63,73.887 83.188,73.445 83.097,73.445 81,71.348 ; R6.2@131.5,58.75 137.134,58.75 140.115,55.769 J1.8@140.115,51.623 ; 68.244,73.3 73.3,68.244 ; 71.039,79.021 72.502,77.558 ; 72.502,77.558 74.317,75.742 ; 73.3,68.244 74.023,68.244 74.822,67.445 75.527,67.445 75.537,67.455 75.83,67.455 76.25,67.875 76.25,71.25 77.53,72.53 79.848,70.211 ; 74.317,75.742 75.742,74.317 ; 75.742,74.317 76.967,73.092 ; 76.967,73.092 77.558,72.502 ; 76.967,73.092 77.558,72.502 ; 77.558,72.502 79.848,70.211 ; 79.848,70.211 79.864,70.211 ; 79.864,70.211 80.775,71.123 81,71.348
  Bottom Layer w0.5: 79.848,70.211 79.856,70.204 80.176,69.884 80.176,66.774 80.988,65.962 U10.94@80.704,65.678 U10.96@79.888,64.862
  Bottom Layer w0.6: v3(77.3,79.9) 77.479,79.9 79.379,78 ; C34.2@126.556,101.4 C34.2@126.61,101.454
  Bottom Layer w0.7: v1(76.4,39.525) v1(77.3,39.525) v1@78.178,39.525 ; v1(76.4,40.225) v1@76.419,40.225 ; v1(76.4,40.925) v1@76.415,40.925 ; v1(76.4,41.625) v1@78.178,41.625 ; v1(76.4,42.325) v1@78.178,42.325 ; v1(76.4,43.025) v1@78.178,43.025 ; v1@76.422,39.525 v1@76.419,40.225 ; v1(77.3,43.725) 77.304,43.025 77.307,42.325 77.311,41.625 v1@77.315,40.925 ; v1@77.322,39.525 v1@77.319,40.225 ; v1@78.178,40.225 v1@77.319,40.225 ; v1@78.178,40.925 v1@77.315,40.925 ; v1(78.2,39.525) 78.196,40.225 78.193,40.925 78.189,41.625 78.185,42.325 78.182,43.025 78.178,43.725 v1(76.4,43.725) 76.404,43.025 76.407,42.325 76.411,41.625 v1@76.415,40.925 ; v1@76.415,40.925 v1@77.315,40.925 ; v1@76.415,40.925 v1@76.419,40.225 ; v1@76.419,40.225 v1(77.3,40.225) v1@77.319,40.225 ; v1@77.315,40.925 v1@77.319,40.225 ; v1(102.775,42.55) v1(102.775,43.25) ; v1(102.775,42.55) v1(103.675,42.55) ; v1(102.775,42.55) v1(102.775,41.85) v1(103.675,41.85) v1(103.675,42.55) ; v1(102.775,43.25) v1(103.675,43.25) ; v1(102.775,43.25) v1(102.775,43.95) ; v1(102.775,43.95) v1(103.675,43.95) ; v1(102.775,43.95) v1(102.775,44.65) v1(103.675,44.65) v1(103.675,43.95) ; v1(103.675,42.55) v1(103.675,43.25) ; v1(103.675,43.25) v1(103.675,43.95) ; v1(110.876,47.8) v1(111.371,48.295) ; v1(110.876,47.8) v1(110.381,47.305) v1(111.018,46.669) v1(111.513,47.164) ; v1(110.876,47.8) v1(111.513,47.164) ; v1(111.371,48.295) v1(112.008,47.659) ; v1(111.371,48.295) v1(111.866,48.79) ; v1(111.513,47.164) v1(112.008,47.659) ; v1(111.866,48.79) v1(112.503,48.154) ; v1(111.866,48.79) v1(112.361,49.285) v1(112.998,48.649) v1(112.503,48.154) ; v1(112.008,47.659) v1(112.503,48.154)
  Bottom Layer w0.8: J5.20@79.89,111.71 J5.19@82.43,111.71 J5.18@84.97,111.71 J5.17@87.51,111.71 ; C37.2@114.985,86.654 114.985,100.561 ; 115.01,100.561 115.849,101.4 C29.2@122.8,101.4 126.556,101.4 130.65,101.4 131.26,100.79 131.26,99.754 131.26,85.702 130.506,84.948 118.977,84.948 118.175,85.75 118.175,87.267 119.31,88.402 C11.2@119.31,90.354 C20.2@119.31,91.854 C21.2@119.31,95.454 119.31,95.947 C19.2@119.863,96.501 119.963,96.601 123,96.601 ; 119.325,89.554 C13.2@121.01,89.554 123,89.554 ; 123,89.554 126.71,89.554 C15.2@126.71,90.954 C17.2@126.71,95.454 126.71,95.847 C18.2@125.956,96.601 123,96.601 ; 123,89.554 C8.2@123,95.3 123,96.601
  Bottom Layer w1: 118.753,101.6 C10.2@118.753,102.947 118.753,105.153 121.654,108.054 135.646,108.054 136.709,106.991 136.709,105.291 138,104 139.7,104 J2.1@139.9,103.8
  Bottom Layer w1.1: C50.2@60.821,42.691 C53.2@68.321,42.691
  Bottom Layer w2: 66.5,42 66.5,37.5 68.45,35.55 ; 69.9,36.8 74.327,36.8 v1@77.313,39.787 ; 93,31.7 92.425,32.275 92.425,41.875 101.575,41.875 v1@103.025,43.325 ; v2(116.3,45.5) v2(117.3,45.5) v2(118.3,45.5) v2(119.4,45.5) 121.25,43.65
  Bottom Layer w2.5: 57.601,65.3 57.601,64 57.601,61.799 57.75,61.65 59.1,60.3 61.6,57.8 67.125,57.8 69.05,57.8 86.2,57.8 87.5,57.8 88.982,57.8 ; 57.795,76.72 57.795,81.725 57.795,88.998 ; 58.097,89.4 60.232,91.534 62.675,91.534 65.4,91.534 66.8,91.534 69.325,91.534 72.725,91.534 76.275,91.534 88.034,91.534 89.034,90.534 90.634,88.934 91.85,87.719 91.85,86.1 91.85,82.9 91.85,79.6 91.85,77.353 91.85,73.851 91.85,70 91.85,66.85 93.6,65.1 97.45,65.1 107.4,65.1 111.713,60.787 114.65,57.85 121.25,51.25 121.25,43.65 121.25,31.75 ; 89.1,57.8 v1(93.1,57.8) 99.48,57.8 103,54.28
  Bottom Layer w4: 68.5,35.5 68.45,35.55 68.45,29.65 70.4,27.7 87.85,27.7 92.425,32.275 ; 93,31.7 93.05,31.75 102.9,31.75 ; 103,31.75 J7.2@126.6,31.75
  other v1: 78.2,40.225 77.3,40.925 78.2,40.925 77.3,41.625 78.2,41.625 77.3,42.325 78.2,42.325 77.3,43.025 78.2,43.025 78.2,43.725 65.55,59.125 91.825,77.275 91.054,78.329 91.825,78.325 90.45,82.025 56.325,86.05
  other v3: 77.3,76.3 123.01,92.304 123.01,94.554
GPI0: D13.3 J5.3 U7.89 | length 144.6
  Top Layer w0.203: v1(53.235,57.035) 53.337,57.035 60.778,49.593 71.414,49.593 74.05,52.23 U7.89@74.05,57.9 ; v1(82.522,104.372) 93.022,104.372 96.419,107.768 96.419,112.999 J5.3@97.67,114.25
  Bottom Layer w0.203: v1(53.235,57.035) 52.04,58.23 52.04,90.945 58.399,97.305 68.404,97.305 75.472,104.372 v1(82.522,104.372) ; J5.3@97.67,114.25 99.725,116.305 116.346,116.305 117.35,115.3 D13.3@117.35,115.025
GPI1: D14.3 J5.13 U7.90 | length 146.3
  Top Layer w0.203: v1(54.3,55.1) 54.06,55.1 59.97,49.191 71.581,49.191 74.55,52.16 U7.90@74.55,57.9 ; v1(81.688,103.555) 81.719,103.525 93.9,103.525 97.67,107.295 J5.13@97.67,111.71 98.959,112.999 98.959,114.768 100.495,116.305 116.27,116.305 117.3,115.275 D14.3@117.3,115.025
  Bottom Layer w0.203: v1(54.3,55.1) 54.3,57.311 52.443,59.168 52.443,90.779 58.566,96.902 69.102,96.902 75.755,103.555 v1(81.688,103.555)
GPI2: D15.3 J5.4 U7.91 | length 152.5
  Top Layer w0.203: v1(52.125,55.925) 53,55.05 53.42,55.05 59.682,48.788 71.748,48.788 75.05,52.09 U7.91@75.05,57.9 ; v1(81.675,105.04) 91.465,105.04 93.85,107.425 93.85,112.97 J5.4@95.13,114.25
  Bottom Layer w0.203: v1(52.125,55.925) 51.637,56.413 51.637,91.112 58.232,97.708 67.883,97.708 75.215,105.04 v1(81.675,105.04) ; J5.4@95.13,114.25 97.588,116.708 119.592,116.708 121.05,115.25 D15.3@121.05,115.025
GPI3: D16.3 J5.14 U7.211 | length 64.2
  Top Layer w0.203: U7.211@74.55,91.7 74.55,95.65 79.7,100.8 v1(89.625,100.8) ; J5.14@95.13,111.71 95.13,112.28 96.419,113.568 96.419,114.768 98.358,116.708 119.642,116.708 121,115.35 D16.3@121,115.025
  Bottom Layer w0.203: v1(89.625,100.8) 90.275,101.45 90.275,106.855 J5.14@95.13,111.71
GPI4: D19.3 J5.5 U7.212 | length 66.1
  Top Layer w0.203: U7.212@74.05,91.7 74.05,96.55 v1(78,100.5) ; v1(89.025,109.9) 89.584,110.459 90.568,110.459 91.302,111.192 91.302,112.253 92.59,113.541 J5.5@92.59,114.25
  Bottom Layer w0.203: v1(78,100.5) 79.625,100.5 v1(89.025,109.9) ; J5.5@92.59,114.25 95.451,117.111 122.964,117.111 124.75,115.325 D19.3@124.75,115.025
GPI5: D20.3 J5.15 U7.149 | length 90.7
  Top Layer w0.203: U7.149@91.7,74.05 95.639,74.05 97.689,76.1 v1(101.3,76.1) ; J5.15@92.59,111.71 92.855,111.975 92.855,112.545 93.447,113.137 93.879,113.568 93.879,114.768 96.221,117.111 122.865,117.111 124.7,115.275 D20.3@124.7,115.025
  Bottom Layer w0.203: J5.15@92.59,111.71 92.59,111.015 88.6,107.025 88.6,100.64 102.8,86.44 102.8,82.132 102.856,82.076 102.856,77.638 101.318,76.1 v1(101.3,76.1)
GPI6: D21.3 J5.6 U7.150 | length 97.3
  Top Layer w0.203: U7.150@91.7,74.55 95.432,74.55 97.892,77.01 v1(101.3,77.01)
  Bottom Layer w0.203: v1(101.3,77.01) 101.318,77.01 102.453,78.145 102.453,81.909 102.397,81.965 102.397,86.273 97.032,91.638 97.004,91.638 94.326,94.316 94.326,94.325 93.825,94.826 93.816,94.826 88.197,100.445 88.197,107.192 91.302,110.296 91.302,112.999 J5.6@90.05,114.25 90.05,114.75 92.813,117.514 126.186,117.514 128.45,115.25 D21.3@128.45,115.025
GPI7: D22.3 J5.16 U7.151 | length 94.7
  Top Layer w0.203: J5.16@90.05,111.71 91.339,112.999 91.339,114.768 94.084,117.514 126.186,117.514 128.4,115.3 D22.3@128.4,115.025 ; U7.151@91.7,75.05 95.225,75.05 98.095,77.92 v1(101.3,77.92)
  Bottom Layer w0.203: J5.16@90.05,111.71 90.05,109.615 87.775,107.34 87.775,100.297 93.649,94.423 93.658,94.423 93.923,94.158 93.923,94.149 96.837,91.235 96.865,91.235 101.994,86.106 101.994,81.798 102.05,81.742 102.05,78.67 v1(101.3,77.92)
GPIO0: D8.3 J5.1 U7.203 | length 48
  Top Layer w0.203: U7.203@78.55,91.7 78.55,95 81.703,98.153 91.925,98.153 92.178,98.407 92.722,98.407 93.353,97.775 94,97.775 v1(94.375,98.15)
  Bottom Layer w0.203: v1(94.375,98.15) 94.375,99.05 101.462,106.136 101.462,112.962 J5.1@102.75,114.25 103.525,115.025 D8.3@109.95,115.025
GPIO1: D9.3 J5.11 U7.207 | length 48.1
  Top Layer w0.203: U7.207@76.55,91.7 76.599,91.749 76.599,92.649 76.923,92.973 76.923,94.752 81.196,99.025 94.07,99.025 94.288,98.807 95.106,98.807 v1(95.175,98.875) ; J5.11@102.75,111.71 106.065,115.025 D9.3@109.9,115.025
  Bottom Layer w0.203: v1(95.175,98.875) 98.544,102.244 98.544,102.472 98.928,102.856 99.156,102.856 99.343,103.043 99.343,103.172 99.728,103.557 99.857,103.557 102.75,106.45 J5.11@102.75,111.71
GPIO2: D11.3 J5.2 U7.200 | length 51.3
  Top Layer w0.203: U7.200@80.05,91.7 80.099,91.749 80.099,94.752 83.097,97.75 v1(92.45,97.75)
  Bottom Layer w0.203: v1(92.45,97.75) 93.725,99.025 93.725,99.25 98.958,104.483 98.959,112.962 100.21,114.213 J5.2@100.21,114.25 100.21,114.535 101.576,115.902 113.149,115.902 113.65,115.4 D11.3@113.65,115.025
GPIO3: D12.3 J5.12 U7.223 | length 60.7
  Top Layer w0.203: U7.223@68.55,91.7 68.599,91.749 68.599,94.252 69.778,95.432 69.832,95.432 70.599,96.199 70.599,96.366 80.132,105.9 v1(91.1,105.9) ; v1(98,105.85) 100.21,108.06 J5.12@100.21,111.71 101.499,112.999 101.499,115.325 102.075,115.902 112.999,115.902 113.6,115.3 D12.3@113.6,115.025
  Bottom Layer w0.203: v1(91.1,105.9) 91.15,105.85 v1(98,105.85)
LED1: R16.2 U7.70 | length 47
  Top Layer w0.203: v1(50.928,57.703) 50.93,57.7 53.669,57.7 58.6,52.768 58.6,52.55 60.244,50.907 62.808,50.907 63.425,51.524 63.425,54.153 64.55,55.278 U7.70@64.55,57.9
  Bottom Layer w0.203: v1(45,78.1) 47.8,78.1 50.25,75.65 50.25,58.38 v1(50.928,57.703)
LED2: R19.2 U7.55 | length 15.6
  Top Layer w0.279: R19.2@45,69.1 45.4,69.1 51.95,62.55 U7.55@57.9,62.55
LED3: R22.2 U7.56 | length 14.4
  Top Layer w0.279: R22.2@45,62.4 46.6,64 49.6,64 51.561,62.039 U7.56@57.975,62.039
NetC4_1: C4.1 D1.6 D1.8 R1.1 U1.36 | length 15.9
  Top Layer w0.254: U1.36@125.121,65.232 124.825,64.936 124.825,62.55 125.05,62.325 D1.8@128.52,62.325 128.52,61.33 129.025,60.825 130.45,60.825 131.06,61.435 D1.6@131.06,62.325 131.06,63.435 131.4,63.775 C4.1@134.2,63.775
NetC5_2: C5.2 J1.16 J1.17 | length 33
  Bottom Layer w0.254: C5.2@139.65,58.75 139.65,63.08 J1.16@140.115,63.545
  Bottom Layer w0.4: J1.17@140.115,38.555 143.75,42.19 143.75,59.91 J1.16@140.115,63.545
NetC6_1: C6.1 U1.35 | length 7.5
  Top Layer w0.2: U1.35@124.767,65.585 124.05,64.868 124.05,60.4 v1(124.775,59.675)
  Bottom Layer w0.254: C6.1@124.75,58.725 124.775,58.75 v1(124.775,59.675) v1@124.825,59.725
NetC9_2: C9.2 J3.16 J3.17 | length 31.6
  Bottom Layer w0.2: J3.17@38.155,29.96 41.365,26.75
  Bottom Layer w0.254: 41.365,26.75 43.3,26.75 ; C9.2@43.3,30.75 43.3,26.75 ; J3.16@63.145,29.96 59.935,26.75 43.3,26.75
NetC40_2: C40.2 J4.7 J4.8 J4.9 | length 17.9
  Bottom Layer w0.254: C40.2@59,112 59,114.75 J4.7@58.25,115.5 64.25,115.5 J4.8@65,116.25 65.75,115.5 J4.9@71.75,115.5
NetC43_2: C43.2 J6.5 J6.6 | length 16
  Top Layer w0.4: J6.6@33.69,37.205 J6.5@33.69,49.245
  Bottom Layer w0.4: C43.2@29.37,37.23 J6.6@33.29,37.23
NetC47_1: C47.1 U4.7 | length 8
  Top Layer w0.3: v1(71.614,38.591) 73.421,40.398 73.421,41.098 73.714,41.391 U4.7@74.471,41.391
  Bottom Layer w0.3: C47.1@68.262,38.5 C47.1@68.171,38.591 v1(71.614,38.591)
NetC54_1: C54.1 R29.2 R31.1 U4.25 | length 10.7
  Top Layer w0.2: U4.25@79.771,41.391 U4.25@80.641,41.391
  Top Layer w0.3: U4.25@80.071,41.391 81.035,41.391 81.621,41.977 81.621,45.771 C54.1@82.45,46.6 82.5,46.65 R29.2@83.95,46.65 R31.1@85.45,46.65
NetC57_2: C57.2 U4.16 | length 8.8
  Top Layer w0.2: U4.16@77.261,37.369 77.271,37.379 U4.16@77.271,37.841 U4.16@77.271,38.141
  Top Layer w0.3: v1(77.271,36.78) U4.16@77.271,37.841
  Bottom Layer w0.3: C57.2@71.25,34.7 75.316,34.7 77.271,36.654 v1(77.271,36.78)
NetC58_2: C58.2 R32.2 | length 1.5
  Top Layer w0.2: C58.2@83.829,50.059 83.829,48.609 R32.2@83.879,48.559
NetC63_1: C63.1 R34.2 R35.1 U5.22 | length 8.6
  Top Layer w0.3: R34.2@100.95,50.425 R34.2@100.95,50.325 ; R35.1@100.95,52.35 R34.2@100.95,50.325 ; U5.22@103.475,46.05 103.475,47.825 102.725,48.575 C63.1@100.9,48.575 100.95,48.625 R34.2@100.95,50.325
NetC68_1: C68.1 R36.2 R37.1 U6.22 | length 8
  Top Layer w0.3: U6.22@113.634,49.568 U6.22@113.846,49.78 114.447,50.381 119.236,55.17 R37.1@119.33,55.17
NetD2_1: D2.1 R16.1 | length 3.3
  Top Layer w0.254: R16.1@45,79.9 45.6,79.9 D2.1@47.5,78
NetD3_1: D3.1 R19.1 | length 3.3
  Top Layer w0.254: R19.1@45,70.9 45.6,70.9 D3.1@47.5,69
NetD4_1: D4.1 R22.1 | length 2.7
  Top Layer w0.2: D4.1@47.4,60.6 D4.1@47.5,60.5
  Top Layer w0.254: R22.1@45,60.6 45.1,60.5 D4.1@47.5,60.5
NetD7_3: D7.3 J6.3 U3.15 | length 21.2
  Top Layer w0.203: J6.3@36,44.5 43.2,51.7 U3.15@48.3,51.7
  Bottom Layer w0.254: D7.3@30.525,45.6 34.9,45.6 J6.3@36,44.5
NetD10_3: D10.3 J6.2 U3.16 | length 22.2
  Top Layer w0.254: J6.2@38,44.5 44.55,51.05 U3.16@48.3,51.05
  Bottom Layer w0.254: D10.3@30.525,41.3 33.046,41.3 34.873,43.127 36.627,43.127 J6.2@38,44.5 J6.2@37.594,44.5
NetD17_1: D17.1 R27.1 | length 6.2
  Top Layer w0.254: R27.1@42.75,43.85 42.75,40.5 D17.1@44.75,38.5
NetD17_2: D17.2 U3.23 | length 11.3
  Top Layer w0.254: D17.2@46.75,38.5 v1(47.75,39.5) ; U3.23@48.3,46.5 49.75,46.5 50.5,45.75 50.5,42.25 v1(49.25,41)
  Bottom Layer w0.254: v1(47.75,39.5) v1(49.25,41)
NetD18_1: D18.1 R28.1 | length 9.5
  Top Layer w0.254: R28.1@45.25,43.85 45.25,42 47,40.25 49.75,40.25 D18.1@51.5,38.5
NetD18_2: D18.2 U3.22 | length 11.7
  Top Layer w0.254: U3.22@48.3,47.15 49.845,47.15 53.5,43.495 D18.2@53.5,38.5
NetD23_1: D23.1 J7.1 | length 5.3
  Top Layer w2.1: J7.1@126.15,37.75 126,37.9 126.6,37.9 126.575,37.925 D23.1@129.75,41.1
NetD24_1: D24.1 R30.2 | length 2.9
  Top Layer w0.3: D24.1@133.4,30.7 R30.2@133.4,33.6
NetJ1_13: J1.13 R2.1 | length 12.5
  Bottom Layer w0.254: R2.1@131.5,53 135.05,49.45 138.56,49.45 139.587,50.478 J1.13@142.095,50.478
NetJ1_14: J1.14 R3.1 | length 12.5
  Bottom Layer w0.254: R3.1@131.5,50.75 135.089,47.16 138.56,47.16 139.587,48.188 J1.14@142.095,48.188
NetJ3_1: J3.1 R9.1 | length 5
  Bottom Layer w0.2: J3.1@55.05,32.333 R9.1@55.05,37.35
NetJ3_2: J3.2 R10.1 | length 5.2
  Bottom Layer w0.2: J3.2@52.55,32.123 R10.1@52.55,37.35
NetJ3_3: J3.3 R11.1 | length 5.4
  Bottom Layer w0.2: J3.3@50.05,31.968 R11.1@50.05,37.35
NetJ3_13: J3.13 R12.1 | length 10.2
  Bottom Layer w0.2: R12.1@47.3,37 47.3,35 48.977,33.323 48.977,31.484 50.078,30.384 J3.13@50.078,27.98
NetJ3_14: J3.14 R13.1 | length 10.1
  Bottom Layer w0.2: R13.1@45.3,37 45.3,35.078 46.687,33.691 46.687,31.484 47.788,30.384 J3.14@47.788,27.98
NetJ4_1: J4.1 R18.1 R21.2 | length 8
  Bottom Layer w0.203: R18.1@63.7,106.95 J4.1@63.7,112.5
  Bottom Layer w0.254: R21.2@61,106.75 R18.1@63.5,106.75
NetJ4_5: J4.5 R17.1 R24.2 | length 9.1
  Top Layer w0.203: J4.5@61.6,110 v1(64.5,110)
  Bottom Layer w0.254: v1(64.5,110) 66.25,108.25 R17.1@66.25,106.75 R24.2@68.5,106.75
NetL1_1: L1.1 U4.1 U4.2 U4.11 U4.12 U4.20 U4.21 U4.30 U4.31 | length 48.5
  Top Layer w0.8: 74.771,35.825 78.7,35.825 79.771,36.896 79.771,39.141 ; 74.771,36.025 74.771,39.125 ; 74.771,44.141 74.771,47.35 ; 74.771,47.55 78.575,47.55 79.771,46.354 79.771,44.391 79.771,44.141
  Top Layer w1.2: 74.771,36.025 65.975,36.025 64.946,37.054 64.946,41.246 65.8,42.1 68.855,42.1 72.871,46.116 74.105,47.35 74.771,47.35
NetL2_1: L2.1 U5.5 U5.6 U5.7 U5.8 U5.13 U5.14 U5.15 U5.16 | length 21.7
  Top Layer w0.4: U5.8@101.925,41.55 U5.5@101.925,42.95 ; U5.13@104.525,41.55 U5.16@104.525,42.95
  Top Layer w1.2: 101.513,39.388 102.1,38.8 104.3,38.8 104.925,39.425 104.925,41.394 U5.15@104.925,42.55 ; 101.525,39.4 U5.6@101.525,42.5
  Top Layer w1.8: L2.1@92.925,41.75 101.037,41.75 ; 100.538,41.75 101.025,42.238
NetL3_1: L3.1 U6.5 U6.6 U6.7 U6.8 U6.13 U6.14 U6.15 U6.16 | length 21.8
  Top Layer w0.4: U6.8@109.568,47.694 U6.5@110.558,48.684 ; U6.13@111.407,45.856 U6.16@112.397,46.846
  Top Layer w1.2: U6.6@109.957,48.649 108.265,46.956 107.84,46.532 107.84,45.745 109.458,44.128 110.245,44.128 110.669,44.552 111.579,45.462 112.008,45.891 112.361,46.245 U6.15@112.397,46.28
  Top Layer w1.8: L3.1@104.386,55.866 107.5,52.752 107.5,50.5 U6.7@109.25,48.75
NetR7_2: R7.2 U1.38 | length 7.9
  Top Layer w0.2: U1.38@126.783,65.585 v1(128.365,64.003)
  Bottom Layer w0.254: v1(128.365,64.003) 129.25,63.118 R7.2@129.25,58.725
NetR8_2: R8.2 U1.37 | length 6.7
  Top Layer w0.2: U1.37@126.429,65.232 126.429,63.571 v1(126.5,63.5)
  Bottom Layer w0.254: v1(126.5,63.5) 126.532,63.468 126.532,59.193 R8.2@127,58.725
NetR14_1: R14.1 R17.2 | length 2.3
  Bottom Layer w0.254: R14.1@66.25,102.9 R17.2@66.25,105.25
NetR15_1: R15.1 R18.2 | length 2.3
  Bottom Layer w0.254: R15.1@63.5,102.9 R18.2@63.5,105.25
NetR20_2: R20.2 R21.1 | length 2.3
  Bottom Layer w0.254: R20.2@61,102.9 R21.1@61,105.25
NetR23_2: R23.2 R24.1 | length 2.3
  Bottom Layer w0.254: R23.2@68.5,102.9 R24.1@68.5,105.25
NetR32_1: R32.1 U4.26 | length 8.2
  Top Layer w0.3: U4.26@80.071,41.891 80.828,41.891 81.121,42.184 81.121,47.4 R32.1@82.379,48.659
NetR33_1: R33.1 U4.6 | length 6.9
  Top Layer w0.3: v1(71.641,40.341) 73.191,41.891 U4.6@74.471,41.891
  Bottom Layer w0.3: R33.1@68.221,40.341 v1(71.641,40.341)
NetR38_2: R38.2 U7.26 U8.9 | length 54.6
  Top Layer w0.2: U8.9@35.02,108.98 38.52,108.98 43.116,104.384 43.116,77.916 44.031,77 49.8,77 52.3,77 U7.26@57.85,77
  Bottom Layer w0.254: R38.2@34.975,112.025 34.975,109.025 U8.9@35.02,108.98
NetR39_2: R39.2 U7.28 U8.5 | length 54.7
  Top Layer w0.2: U8.5@35.02,103.9 35.21,103.71 37.79,103.71 40.4,101.1 40.4,90.1 41.7,88.8 41.7,78.2 43.85,76.05 U7.28@57.9,76.05
  Bottom Layer w0.2: U8.5@35.02,103.9 36.95,105.83 R39.2@36.95,110.775
NetR40_2: R40.2 U7.27 U8.1 | length 45.6
  Top Layer w0.2: v1@41.175,96.95 v1(41.175,96.975) 42.242,95.908 42.242,78.224 43.916,76.55 U7.27@57.9,76.55
  Bottom Layer w0.2: R40.2@35.025,95.725 35.025,98.815 U8.1@35.02,98.82 39.33,98.82 v1(41.175,96.975)
NetR41_2: R41.2 U7.17 | length 3.4
  Top Layer w0.2: R41.2@54.925,81.725 55.65,81 56.481,81 56.91,81.429 56.91,81.435 56.975,81.5 U7.17@57.85,81.5
NetR42_2: R42.2 U7.153 | length 4.3
  Top Layer w0.2: U7.153@91.7,76.05 94.275,76.05 R42.2@95.525,77.3
NetR43_2: R43.2 U7.25 | length 4.1
  Top Layer w0.2: R43.2@54,78 55.425,78 55.875,77.55 U7.25@57.9,77.55
NetU7_12: U7.12 U9.15 | length 30.3
  Top Layer w0.2: v1(49,88) 53.33,83.67 56.645,83.67 57.025,84.05 U7.12@57.9,84.05 ; U7.12@57.9,84 U7.12@57.95,84
  Bottom Layer w0.2: U9.15@44.875,104.425 47.075,104.425 49,102.5 v1(49,88)
NetU7_14: U7.14 U9.7 | length 23.5
  Top Layer w0.2: v1(50.5,85.5) 52.9,83.1 U7.14@57.85,83.1
  Bottom Layer w0.2: v1(50.5,85.5) 50.5,96.5 52.075,98.075 U9.7@54.025,98.075
NetU7_23: U7.23 U9.16 | length 37.5
  Top Layer w0.2: v1(50.3,80.8) 50.326,80.8 51.826,79.3 55.8,79.3 56.55,78.55 U7.23@57.9,78.55
  Bottom Layer w0.2: U9.16@44.195,105.695 U9.16@44.875,105.695 46.805,105.695 49.655,102.845 49.655,81.455 50.3,80.81 v1(50.3,80.8)
NetU7_24: U7.24 U9.8 | length 27.5
  Top Layer w0.2: v1(50.9,79.3) 51.45,78.75 55.643,78.75 56.343,78.05 U7.24@57.9,78.05
  Bottom Layer w0.2: v1(50.9,79.3) 50.955,79.355 50.955,80.23 51.193,80.468 51.193,95.992 52.005,96.805 U9.8@54.025,96.805
NetU7_29: U7.29 U8.3 | length 44.9
  Top Layer w0.2: U8.3@35.02,101.36 37.39,101.36 40,98.75 40,89.934 41.3,88.634 41.3,78.034 43.729,75.605 56.646,75.605 56.651,75.6 U7.29@57.85,75.6
PS2_CLK: D5.3 R23.1 U7.224 | length 13.5
  Top Layer w0.254: D5.3@66.5,101.675 v1(68.05,100.125) 68.05,99.225 68.05,99.18 ccw(c68.096,99.18) 68.096,99.134 cw(c68.096,98.88) 68.35,98.88 cw(c68.096,98.88) 68.096,98.626 ccw(c68.096,98.58) 68.05,98.58 68.05,98.164 ccw(c68.096,98.164) 68.096,98.118 cw(c68.096,97.864) 68.35,97.864 cw(c68.096,97.864) 68.096,97.61 ccw(c68.096,97.564) 68.05,97.564 68.05,97.148 ccw(c68.096,97.148) 68.096,97.102 cw(c68.096,96.848) 68.35,96.848 cw(c68.096,96.848) 68.096,96.594 ccw(c68.096,96.548) 68.05,96.548 68.05,96.132 ccw(c68.096,96.132) 68.096,96.086 cw(c68.096,95.832) 68.35,95.832 cw(c68.096,95.832) 68.096,95.578 ccw(c68.096,95.532) 68.05,95.532 68.05,95.116 ccw(c68.096,95.116) 68.096,95.07 cw(c68.096,94.816) 68.35,94.816 cw(c68.096,94.816) 68.096,94.562 ccw(c68.096,94.516) 68.05,94.516 68.05,94.054 68.05,93.8 U7.224@68.05,91.7
  Bottom Layer w0.254: v1(68.05,100.125) 68.5,100.575 R23.1@68.5,101.1
PS2_DATA: D6.3 R20.1 U7.230 | length 13.5
  Top Layer w0.203: D6.3@62.5,101.675 62.375,101.675 v1(61,100.3) 64.4,96.9 64.4,93.2 64.774,92.826 64.781,92.826 65.002,92.606 65.002,91.749 U7.230@65.05,91.7
  Bottom Layer w0.203: v1(61,100.3) R20.1@61,101.4
SRAM_ADDR0: U7.21 U10.37 | length 17
  Top Layer w0.203: U7.21@57.9,79.55 58.757,79.55 59.097,79.89 59.097,80.472 59.797,81.172 59.809,81.172 60.029,81.393 60.029,81.404 60.324,81.699 60.336,81.699 60.604,81.967 60.604,81.979 60.898,82.273 61.133,82.273 61.141,82.281 62.506,82.281 62.514,82.273 67.377,82.273 67.775,81.875 67.863,81.787 cw(c67.795,81.718) 67.863,81.65 ccw(c68.007,81.506) 67.863,81.362 ccw(c68.007,81.506) 68.15,81.362 cw(c68.219,81.294) 68.288,81.362 68.363,81.288 68.55,81.1 68.55,80.35 v1(68.175,79.975)
  Bottom Layer w0.203: U10.37@65.678,80.704 66.408,79.975 v1(68.175,79.975)